# Altium PCB New_Design.PcbDoc
Units mm, origin at the board's own origin, x right, y up, seen from the top; angles counter-clockwise.
Board outline 30.1 x 52.07 mm, 2 copper layers (Top Layer, Bottom Layer); 3 components, 16 nets, 50 pads, 0 vias.
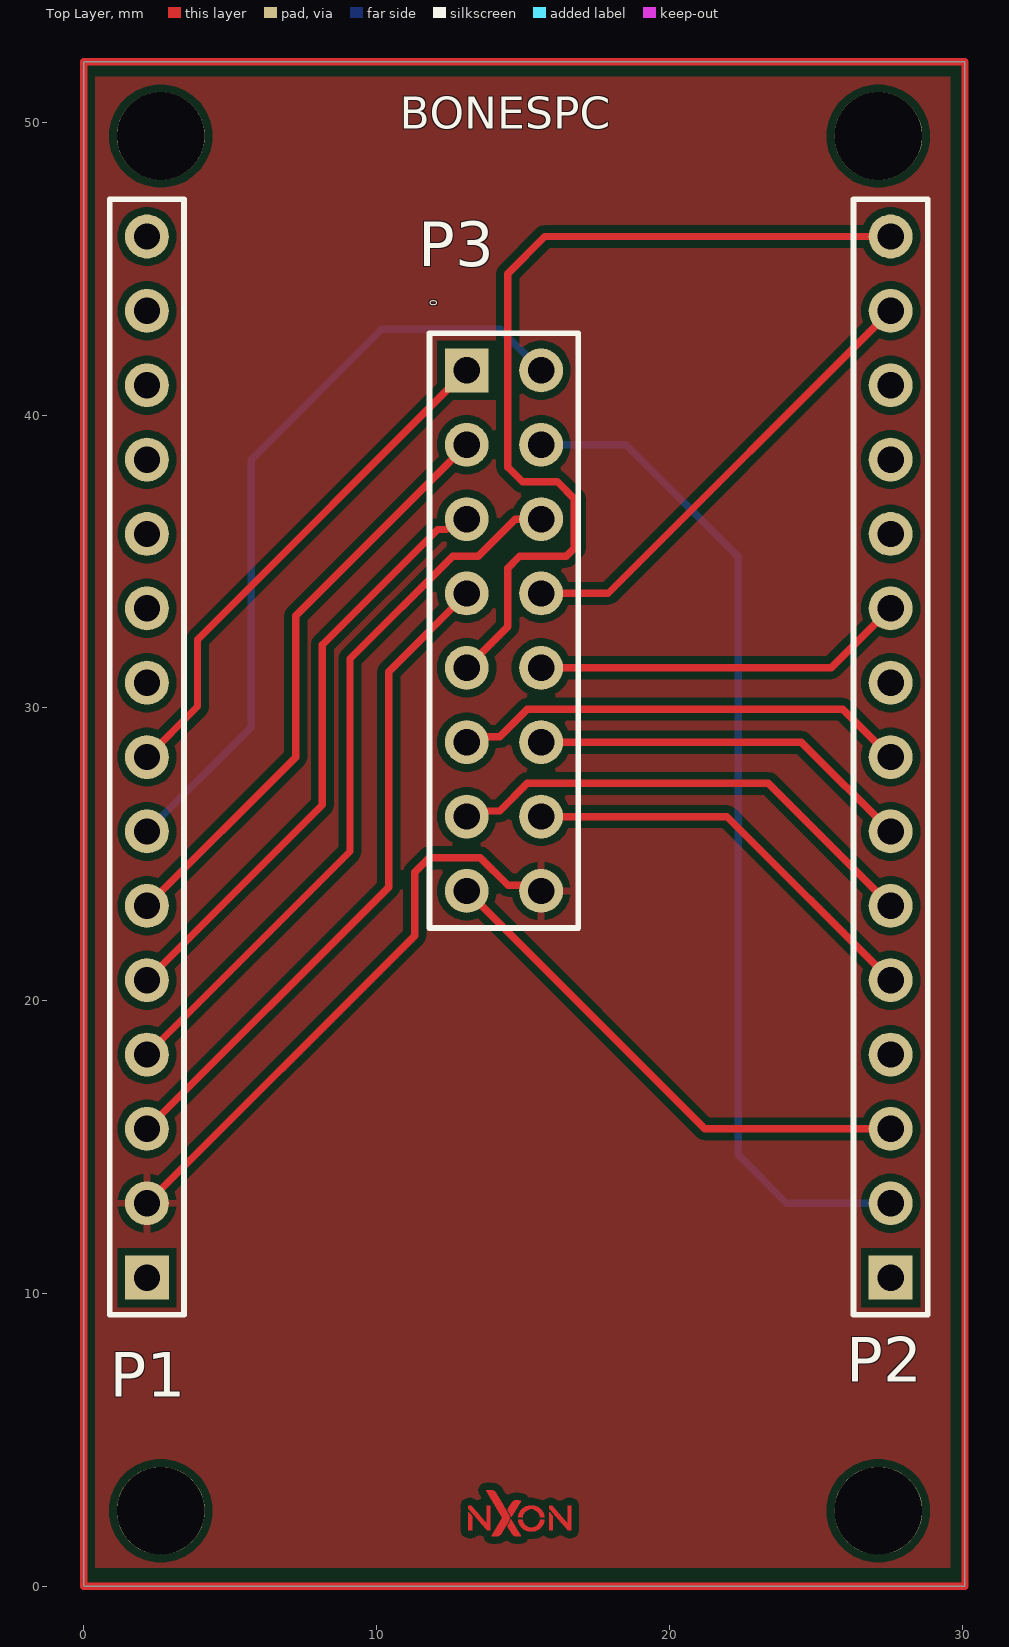
[diagram p0: Top Layer view]
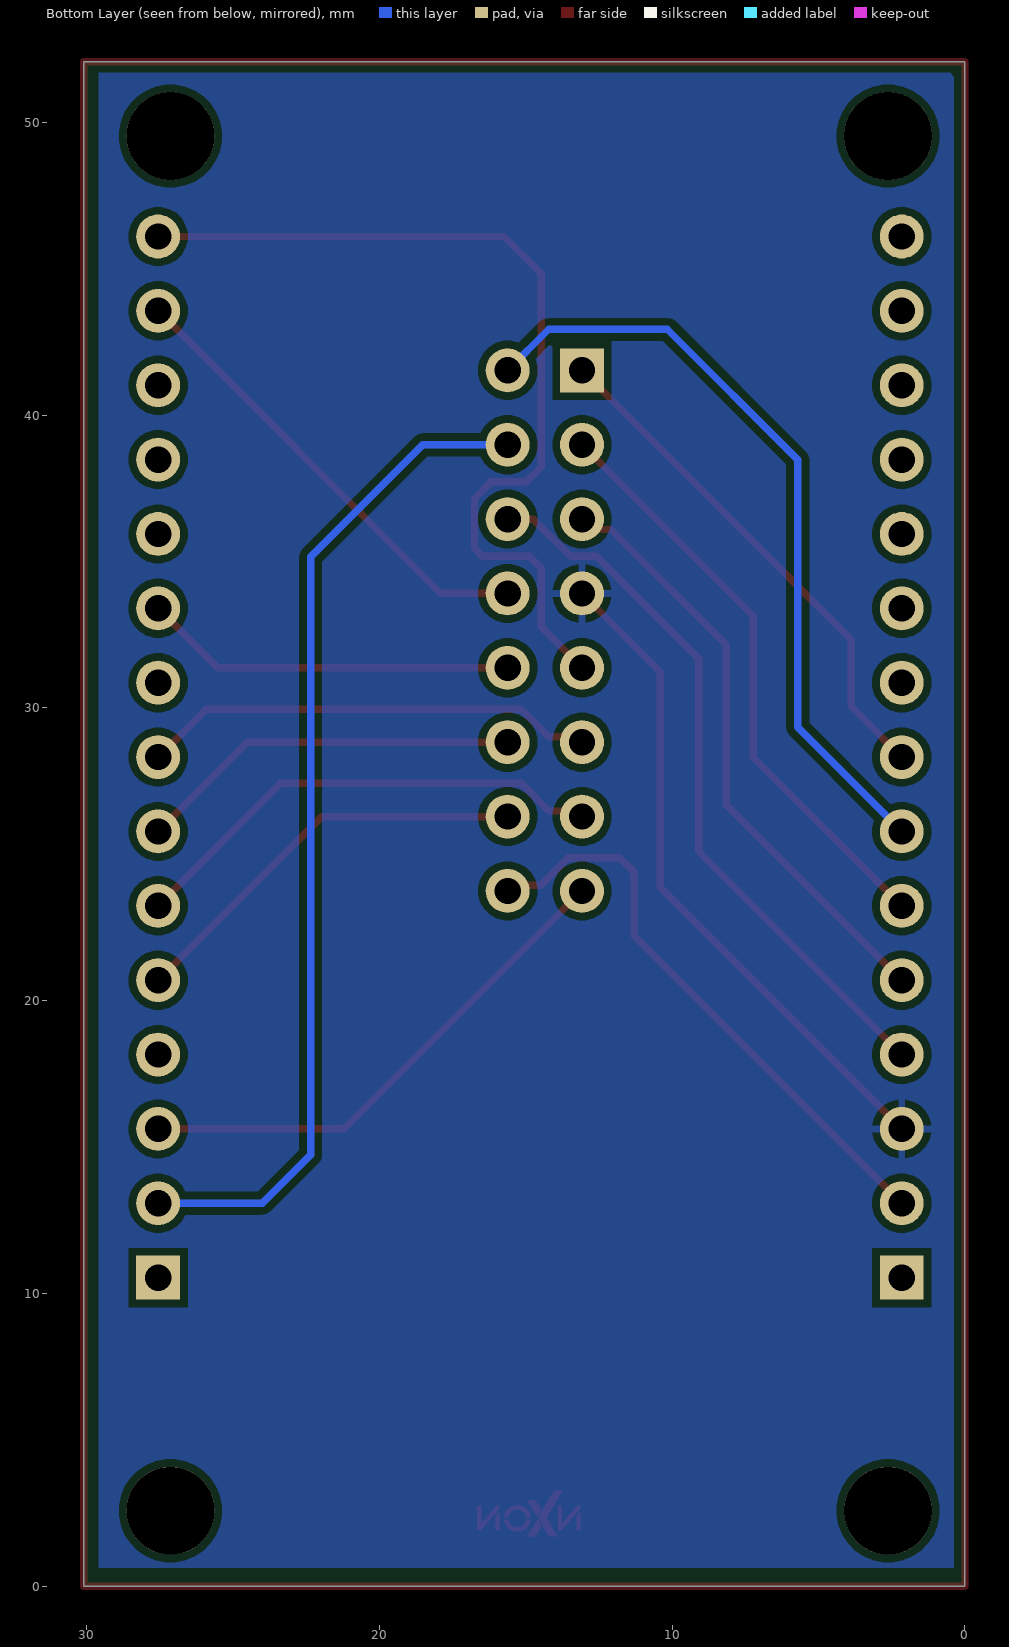
[diagram p1: Bottom Layer view, seen from below]

## Layer stack, top to bottom
Top Solder: solder mask 0.0102, Solder Resist, Dk 3.5
Top Layer: signal copper 0.0356
Dielectric 1: dielectric 0.32, FR-4, Dk 4.8
Bottom Layer: signal copper 0.0356
Bottom Solder: solder mask 0.0102, Solder Resist, Dk 3.5

## Board outline
0,0 0,52.07 30.099,52.07 30.099,0

## Design rules (kind name [scope] priority, off if disabled: settings)
Clearance [All] p1: gap=0.254 ignorepadtopadclearanceinfootprint=FALSE except(0: Arc-Hole Track-Hole SMDPad-Hole THPad-Hole Via-Hole Fill-Hole Poly-Hole Region-Hole Text-Hole)
PolygonConnect [All] p1: connectstyle=Relief reliefconductorwidth=0.254 reliefentries=4 polygonreliefangle="90 Angle" airgapwidth=0.254
RoutingVias [All] p1: holewidth=0.711 width=1.27 viastyle="Through Hole" minholewidth=0.711 minwidth=1.27 maxholewidth=0.711 maxwidth=1.27
SolderMaskExpansion [All] p1: expansion=0.102 istentingtop=FALSE
Width [All] p1: maxlimit=0.254 minlimit=0.254 preferedwidth=0.254
30 further rules are at their usual default settings.

## Components (designator, comment, footprint, x,y, rotation, side; value= is the part's Value field where it differs from the comment)
P1 "Header 15" HDR1X15 2.159,10.541 r90 top
P2 "Header 15" HDR1X15 27.559,10.541 r90 top
P3 "Header 8X2" HDR2X8 13.081,41.529 r270 top

## Footprints (in the part's own frame and the unit in brackets; to place one, negate y for a bottom-side part, rotate by r counter-clockwise, add the part's x,y. Pads: shape width x height; smd on the part's side, far side on the other; paste and mask are expansions set on the pad)
HDR1X15 [mm] "Connector; Header; 15 Position"
  rect 1.5x1.5 hole 0.9: 1(0,0)
  round 1.5 hole 0.9: 2(2.54,0) 3(5.08,0) 4(7.62,0) 5(10.16,0) 6(12.7,0) 7(15.24,0) 8(17.78,0) 9(20.32,0) 10(22.86,0) 11(25.4,0) 12(27.94,0) 13(30.48,0) 14(33.02,0) 15(35.56,0)
  silkscreen extent -1.27,-1.27 36.83,1.27
HDR2X8 [mm] "Connector; Header; 8x2 Position"
  rect 1.5x1.5 hole 0.9: 1(0,0)
  round 1.5 hole 0.9: 2(0,2.54) 3(2.54,0) 4(2.54,2.54) 5(5.08,0) 6(5.08,2.54) 7(7.62,0) 8(7.62,2.54) 9(10.16,0) 10(10.16,2.54) 11(12.7,0) 12(12.7,2.54) 13(15.24,0) 14(15.24,2.54) 15(17.78,0) 16(17.78,2.54)
  silkscreen extent -1.27,-1.27 19.05,3.81

## Part data
P1 P2: "Header, 15-Pin", LatestRevisionDate=17-Jul-2002, LatestRevisionNote="Re-released for DXP Platform.", Publisher="Altium Limited"
P3: "Header, 8-Pin, Dual row", LatestRevisionDate=17-Jul-2002, LatestRevisionNote="Re-released for DXP Platform.", Publisher="Altium Limited"

## Free pads (board coordinates)
  round 3 hole 3: 11(2.629,49.531) 11(27.139,49.531) ""(2.629,2.581) ""(27.139,2.581)

## Nets (pads, with @x,y where several pads share a name; then routed paths per layer and width w, separated by ;. In a path a pad name is that pad's centre, name@x,y a point inside that pad or via, vN(x,y) a via of type N, cw(c..) or ccw(c..) an arc to the next point about the centre after c; other vN are vias at no path point)
NetP1_2: P1.2 P3.16 | length 20.1
  Top Layer w0.254: P1.2 11.303,22.225 11.303,24.384 11.799,24.88 13.549,24.88 14.49,23.939 15.431,23.939 P3.16
NetP1_3: P1.3 P3.7 | length 22.8
  Top Layer w0.254: P1.3 10.414,23.876 10.414,31.242 P3.7
NetP1_4: P1.4 P3.6 | length 24.9
  Top Layer w0.254: P1.4 9.093,25.095 9.093,31.674 12.598,35.179 13.474,35.179 14.744,36.449 P3.6
NetP1_5: P1.5 P3.5 | length 20.6
  Top Layer w0.254: P1.5 8.153,26.695 8.153,32.156 12.091,36.094 12.389,36.094 12.744,36.449 P3.5
NetP1_6: P1.6 P3.3 | length 20.3
  Top Layer w0.254: P1.6 7.239,28.321 7.239,33.147 P3.3
NetP1_7: P1.7 P3.2 | length 26.8
  Bottom Layer w0.254: P1.7 5.715,29.337 5.715,38.481 10.16,42.926 14.224,42.926 P3.2 P3.2@15.284,41.529
NetP1_8: P1.8 P3.1 | length 17.7
  Top Layer w0.254: P1.8 3.886,30.048 3.886,32.334 P3.1
NetP2_2: P2.2 P3.4 | length 34.8
  Bottom Layer w0.254: P3.4 18.52,38.989 22.352,35.157 22.352,14.732 24.003,13.081 P2.2 P2.2@27.432,12.954
NetP2_3: P2.3 P3.15 | length 17.8
  Top Layer w0.254: P3.15 21.209,15.621 P2.3
NetP2_5: P2.5 P3.14 | length 14.3
  Top Layer w0.254: P3.14 21.971,26.289 P2.5
NetP2_6: P2.6 P3.13 | length 16.7
  Top Layer w0.254: P3.13 13.271,26.479 14.212,26.479 15.153,27.42 23.38,27.42 P2.6
NetP2_7: P2.7 P3.12 | length 13.2
  Top Layer w0.254: P3.12 24.511,28.829 P2.7
NetP2_8: P2.8 P3.11 | length 15.6
  Top Layer w0.254: P3.11 13.271,29.019 14.212,29.019 15.153,29.96 25.92,29.96 P2.8
NetP2_10: P2.10 P3.10 | length 12.8
  Top Layer w0.254: P3.10 25.527,31.369 P2.10
NetP2_14: P2.14 P3.8 | length 15.9
  Top Layer w0.254: P3.8 17.907,33.909 P2.14
NetP2_15: P2.15 P3.9 | length 31.2
  Top Layer w0.254: P3.9 14.478,32.766 14.478,34.773 14.884,35.179 16.485,35.179 16.752,35.446 16.752,37.147 16.18,37.719 14.986,37.719 14.478,38.227 14.478,44.831 15.748,46.101 P2.15
pads on no net: P1.1 P1.9 P1.10 P1.11 P1.12 P1.13 P1.14 P1.15 P2.1 P2.4 P2.9 P2.11 P2.12 P2.13
copper on no net: | length 164.3
  Top Layer w0.254: 0,0 30.099,0 30.099,52.07 0,52.07 0,0

## Polygon pours and split planes (outlines as drawn)
NetP1_3 on Bottom Layer "NETP1_3_L02_P002" (solid, remove dead copper, pour order 2): 0.381,51.562 0.508,51.689 29.591,51.689 29.591,0.635 0.381,0.635
NetP1_2 on Top Layer "NETP1_2_L01_P000" (solid, remove dead copper, pour order 0): 0.381,51.562 29.591,51.562 29.591,0.635 0.381,0.635

## Other copper
Top Layer:
  region: 225 vertices and 0 holes, not listed, extent 14.476,1.708 14.933,2.282
  region: 394 vertices and 0 holes, not listed, extent 13.137,1.906 13.89,2.758
  region: 287 vertices and 0 holes, not listed, extent 14.84,1.875 15.736,2.276
  region: 13.266,2.011 13.266,1.912 13.26,1.912 13.26,1.906 13.143,1.906 13.143,1.912 13.137,1.912 13.137,2.523 13.149,2.523 13.149,2.517 13.155,2.517 13.155,2.511 13.161,2.511 13.161,2.505 13.167,2.505 13.167,2.499 13.174,2.499 13.174,2.492 13.18,2.492 13.18,2.48 13.186,2.48 13.186,2.474 13.192,2.474 13.192,2.468 13.198,2.468 13.198,2.462 13.204,2.462 13.204,2.455 13.211,2.455 13.211,2.449 13.217,2.449 13.217,2.443 13.223,2.443 13.223,2.437 13.229,2.437 13.229,2.424 13.235,2.424 13.235,2.418 13.242,2.418 13.242,2.412 13.248,2.412 13.248,2.406 13.254,2.406 13.254,2.4 13.26,2.4 13.26,2.394 13.266,2.394 13.266,2.017
  region: 16.026,2.332 16.026,1.906 15.909,1.906 15.909,1.912 15.902,1.912 15.902,2.523 15.909,2.523 15.909,2.517 15.915,2.517 15.915,2.511 15.921,2.511 15.921,2.505 15.927,2.505 15.927,2.499 15.933,2.499 15.933,2.492 15.939,2.492 15.939,2.486 15.946,2.486 15.946,2.48 15.952,2.48 15.952,2.474 15.958,2.474 15.958,2.462 15.964,2.462 15.964,2.455 15.97,2.455 15.97,2.449 15.976,2.449 15.976,2.443 15.983,2.443 15.983,2.437 15.989,2.437 15.989,2.431 15.995,2.431 15.995,2.424 16.001,2.424 16.001,2.418 16.007,2.418 16.007,2.406 16.013,2.406 16.013,2.4 16.02,2.4 16.02,2.394 16.026,2.394 16.026,2.338
  region: 291 vertices and 0 holes, not listed, extent 14.84,2.357 15.736,2.758
  region: 595 vertices and 0 holes, not listed, extent 13.742,1.708 14.544,3.283
  region: 391 vertices and 0 holes, not listed, extent 15.902,1.906 16.656,2.758
  region: 234 vertices and 0 holes, not listed, extent 14.476,2.363 14.945,2.931

## Silkscreen, mask and mechanical layers (free items; w line width, h text height)
Top Overlay:
  text "BONESPC" at 10.795,49.784 h1.1

## Text inside footprints (layer, text, board x,y; h text height)
P3: Top Overlay "0" at 11.811,43.942 h0.25 r270